# EAGLE board Frame2TTL_v2_1_1_Sensor (EAGLE 9.6.2)
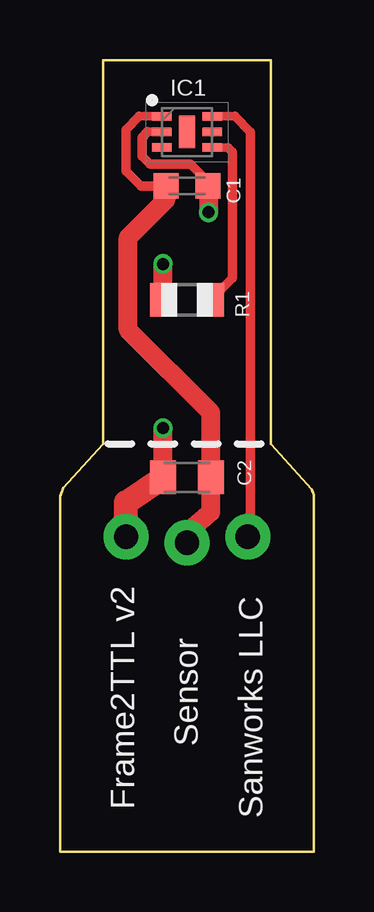
[diagram p0: board, top side]
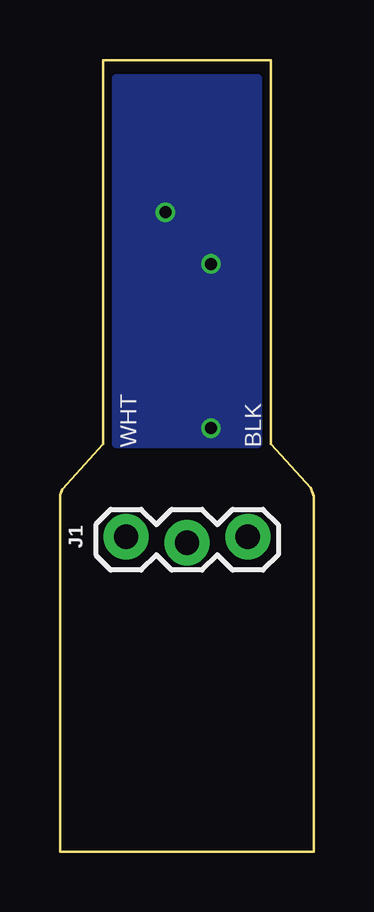
[diagram p1: board, bottom side, seen from below]

Size 10.6 x 33 mm. Coordinates in mm from the lower left corner, seen from the top.
Outline: 8.8,17 10.51,15.1 10.6,14.87 10.6,0 0,0 0,14.8 0.13,15.15 1.8,17 1.8,33 8.8,33 8.8,17
Copper layers (1*16): Top 0.035mm / dielectric 1.5mm / Bottom 0.035mm
Design rules "SeeedStudio_2layer_DRU_no_angle_20140221": minimum track width 6mil, minimum drill 12mil, track to track 6mil, track to pad 6mil, pad to pad 6mil, via to via 6mil, smd to smd 0mil, copper to edge 10mil, drill to drill 10mil, minimum pad ring 10mil, minimum via ring 6mil, stop-mask expansion 2mil, vias tented up to drill 100mil, thermal gap 10mil

## Footprints (pad centres in the part's own frame; a part is rotated, then mirrored left to right if it is on the bottom)
C0603K = smd 1.05 x 1.08: 1 -0.875,0; 2 0.875,0
C0805K = smd 1.1 x 1.4: 1 -1,0; 2 1,0
SON65P210X200X80-7N = smd 0.8 x 0.35: 1 -1.05,0.65; 2 -1.05,0; 3 -1.05,-0.65; 4 1.05,-0.65; 5 1.05,0; 6 1.05,0.65 | smd 0.65 x 1.35: 7 0,0
1X03_LOCK = drill 1.016 pad 1.88: 1 0,0.127; 2 2.54,-0.127; 3 5.08,0.127
R0805 = smd 1.1 x 1.4: 1 -1,0; 2 1,0

## Placement (x,y rotation side)
C1  0.1uf  [C0603K]  5.3,27.75 180 top
C2  10uf  [C0805K]  5.3,15.6 0 top
IC1  ISL76671AROZ-T7A  [SON65P210X200X80-7N]  5.3,30 0 top
J1  [1X03_LOCK]  7.84,13 0 bottom
R1  100k  [R0805]  5.3,23 180 top

## Library data of the parts
C1 C2 R1 = adafruit
IC1 = SamacSys_Parts; DESCRIPTION: Light to Analog Sensors (Voltage) Low Power, <100 Lux Optimized, Analog Output Ambient Light Sensor; HEIGHT: 0.8mm; MANUFACTURER_NAME: Renesas Electronics; MANUFACTURER_PART_NUMBER: ISL76671AROZ-T7A; MOUSER_PART_NUMBER: 968-ISL76671AROZ-T7A; MOUSER_PRICE-STOCK: https://www.mouser.com/Search/Refine.aspx?Keyword=968-ISL76671AROZ-T7A
J1 = SparkFun-Connectors

## Nets
GND: C1.1 C2.1 IC1.2 J1.3 R1.2
N$1: IC1.6 J1.1
N$2: IC1.4 R1.1
VCC: C1.2 C2.2 IC1.1 J1.2

## Tracks (layer width: path | path; a pad name or v marks a point on that pad's centre or on a via)
GND  (via drill 0.5)
  Top 0.35: 6.2,27.8 6.2,27.75 | IC1.2 3.66,30
  Top 0.4: C1.1 6.18,27.93 5.45,28.65 3.76,28.65 3.42,28.99 3.42,29.76 3.66,30
  Top 0.8: 6.2,27.75 C1.1 6.2,27.73 v6.2,26.65 | C2.1 v4.3,17.65 | R1.2 v4.3,24.5 | v4.3,24.5
  Top 1: J1.3 2.76,14.56 C2.1
  pour Bottom: 2.35,17 2.35,32.25 8.25,32.25 8.25,17
N$1
  Top 0.35: IC1.6 7.3,30.65
  Top 0.4: J1.1 7.95,13.24 7.95,30 7.3,30.65
N$2
  Top 0.35: IC1.4 7,29.35
  Top 0.4: 7,29.35 7.2,29.15 7.2,23.9 R1.1
VCC
  Top 0.35: IC1.1 3.3,30.65
  Top 0.4: 3.3,30.65 2.75,30.1 2.75,28.38 3.38,27.75 C1.2
  Top 0.8: J1.2 5.3,13.3 6.3,14.15 C2.2 6.3,18.3 2.85,21.75 2.85,25.6 4.43,27.18 C1.2

## Text on the board
tPlace: Sanworks LLC | Sensor | Frame2TTL v2
bPlace: BLK | WHT